# EAGLE board CT_schematic (EAGLE 7.6.0)

Size 100 x 80 mm. Coordinates in mm from the lower left corner, seen from the top.
Outline: 0,0 100,0 100,80 0,80 0,0
Copper layers (1*16): Top 0.035mm / dielectric 1.5mm / Bottom 0.035mm
Design rules "default": minimum track width 10mil, minimum drill 24mil, track to track 8mil, track to pad 8mil, pad to pad 8mil, via to via 8mil, smd to smd 8mil, copper to edge 40mil, drill to drill 8mil, minimum pad ring 10mil, minimum via ring 8mil, stop-mask expansion 4mil, vias tented up to drill 0mil, thermal gap 10mil

## Footprints (pad centres in the part's own frame; a part is rotated, then mirrored left to right if it is on the bottom)
C0603 = smd 0.8 x 0.8: 1 -0.762,0; 2 0.762,0
C0402 = smd 0.5 x 0.5: 1 -0.508,0; 2 0.508,0
C0805 = smd 1.2 x 1.3: 1 -1.016,0; 2 1.016,0
C1206 = smd 1.3 x 1.6: 1 -1.524,0; 2 1.524,0
DR1040 = smd 1.6 x 3.2: 1 -4.458,0; 2 4.458,0
R0603 = smd 0.8 x 0.8: 1 -0.762,0; 2 0.762,0
LQFP64 = smd 0.3 x 1.2: 1 -3.75,-5.75; 2 -3.25,-5.75; 3 -2.75,-5.75; 4 -2.25,-5.75; 5 -1.75,-5.75; 6 -1.25,-5.75; 7 -0.75,-5.75; 8 -0.25,-5.75; 9 0.25,-5.75; 10 0.75,-5.75; 11 1.25,-5.75; 12 1.75,-5.75; 13 2.25,-5.75; 14 2.75,-5.75; 15 3.25,-5.75; 16 3.75,-5.75; 33 3.75,5.75; 34 3.25,5.75; 35 2.75,5.75; 36 2.25,5.75; 37 1.75,5.75; 38 1.25,5.75; 39 0.75,5.75; 40 0.25,5.75; 41 -0.25,5.75; 42 -0.75,5.75; 43 -1.25,5.75; 44 -1.75,5.75; 45 -2.25,5.75; 46 -2.75,5.75; 47 -3.25,5.75; 48 -3.75,5.75 | smd 1.2 x 0.3: 17 5.75,-3.75; 18 5.75,-3.25; 19 5.75,-2.75; 20 5.75,-2.25; 21 5.75,-1.75; 22 5.75,-1.25; 23 5.75,-0.75; 24 5.75,-0.25; 25 5.75,0.25; 26 5.75,0.75; 27 5.75,1.25; 28 5.75,1.75; 29 5.75,2.25; 30 5.75,2.75; 31 5.75,3.25; 32 5.75,3.75; 49 -5.75,3.75; 50 -5.75,3.25; 51 -5.75,2.75; 52 -5.75,2.25; 53 -5.75,1.75; 54 -5.75,1.25; 55 -5.75,0.75; 56 -5.75,0.25; 57 -5.75,-0.25; 58 -5.75,-0.75; 59 -5.75,-1.25; 60 -5.75,-1.75; 61 -5.75,-2.25; 62 -5.75,-2.75; 63 -5.75,-3.25; 64 -5.75,-3.75
A2500R24A00GM = smd 1.5 x 0.61: 1 -3,7; 2 -3,6; 3 -3,5; 4 -3,4; 5 -3,3; 6 -3,2; 7 -3,1; 8 -3,0; 17 5.22,0; 18 5.22,1; 19 5.22,2; 20 5.22,3; 21 5.22,4; 22 5.22,5; 23 5.22,6; 24 5.22,7 | smd 0.61 x 1.5: 9 -2.39,-1.6; 10 -1.39,-1.6; 11 -0.39,-1.6; 12 0.61,-1.6; 13 1.61,-1.6; 14 2.61,-1.6; 15 3.61,-1.6; 16 4.61,-1.6 | smd 1 x 1: 25 -2.8,9; 26 -2.8,13; 27 5.02,9; 28 5.02,13; 29 0.11,5.75; 30 2.11,5.75
TST-110-05-T-D-RA = drill 1 pad 1.7 square: 1 0,0 | drill 1 pad 1.7: 2 0,2.54; 3 2.54,0; 4 2.54,2.54; 5 5.08,0; 6 5.08,2.54; 7 7.62,0; 8 7.62,2.54; 9 10.16,0; 10 10.16,2.54; 11 12.7,0; 12 12.7,2.54; 13 15.24,0; 14 15.24,2.54; 15 17.78,0; 16 17.78,2.54; 17 20.32,0; 18 20.32,2.54; 19 22.86,0; 20 22.86,2.54
FCI_10118193-0001LF = smd 0.4 x 1.35: 1 -1.3,2.675; 2 -0.65,2.675; 3 0,2.675; 4 0.65,2.675; 5 1.3,2.675 | smd 1.6 x 1.4: 6 -3.2,2.45; 7 3.2,2.45 | smd 1.9 x 1.9: 8 -1.2,0; 9 1.2,0 | hole 0.5: -3.3,0; 3.3,0
SOT143B = smd 1 x 0.7: 1 -0.75,-1 | smd 0.6 x 0.7: 2 0.95,-1; 3 0.95,1; 4 -0.95,1
ABLS-25.000MHZ-B2F-T = smd 5.6 x 2.8: 1 -3.81,0; 2 5.69,0
ASEK = smd 1.4 x 1: 1 -1.1,-0.8; 2 1.1,-0.8; 3 1.1,0.8; 4 -1.1,0.8
TSOT-23-5 = smd 1.3 x 0.62: 1 -1.31,0.95; 2 -1.31,0; 3 -1.31,-0.95; 4 1.31,-0.95; 5 1.31,0.95
DFN8_2X3MC = smd 0.813 x 0.305: 1 -1.398,0.75; 2 -1.398,0.25; 3 -1.398,-0.25; 4 -1.398,-0.75; 5 1.398,-0.75; 6 1.398,-0.25; 7 1.398,0.25; 8 1.398,0.75 | smd 1.753 x 1.549: 9 0,0
JST-2-SMD = smd 1 x 4.6: 1 -1,-3.7; 2 1,-3.7 | smd 1.6 x 3.4: NC1 -3.4,1.5; NC2 3.4,1.5
SON-6 = smd 0.55 x 0.3: 1 -0.355,0.5 | smd 0.52 x 0.3: 2 -0.37,0; 3 -0.37,-0.5; 4 0.37,-0.5; 5 0.37,0; 6 0.37,0.5
SW_4-1437565-2 = smd 1.4 x 2.1: 1 -2.23,4.55; 2 -2.23,-4.55; 3 2.23,4.55; 4 2.23,-4.55
LGM67K-G1J2-24-Z = smd 0.8 x 1.4: A -2,0; C 0,0
NC7SZ125M5X = smd 1.3 x 0.7: 1 -1.3,0.95; 2 -1.3,0; 3 -1.3,-0.95; 4 1.3,-0.95; 5 1.3,0.95
DUMMY_PACKAGE_112 = drill 0.3: 1 0,-1; 2 1.5,-1; 3 3,-1

## Placement (x,y rotation side)
C1  1e-07  [C0603]  -58.42,63.5 0 top  (outside the outline)
C2  1e-07  [C0603]  -62.23,63.5 0 top  (outside the outline)
C3  1e-07  [C0603]  -15.24,68.58 0 top  (outside the outline)
C4  1e-07  [C0603]  -19.05,68.58 0 top  (outside the outline)
C5  4.7e-06  [C0603]  -54.61,63.5 0 top  (outside the outline)
C6  1e-07  [C0603]  -22.86,68.58 0 top  (outside the outline)
C7  1e-08  [C0603]  -26.67,68.58 0 top  (outside the outline)
C8  1e-06  [C0603]  -30.48,68.58 0 top  (outside the outline)
C9  1e-11  [C0402]  -49.53,68.58 0 top  (outside the outline)
C10  1e-11  [C0402]  -53.34,68.58 0 top  (outside the outline)
C11  1e-05  [C0805]  -40.64,57.15 0 top  (outside the outline)
C12  1e-07  [C0402]  -57.15,68.58 0 top  (outside the outline)
C13  1e-08  [C0402]  -60.96,68.58 0 top  (outside the outline)
C14  1e-05  [C0805]  -45.72,57.15 0 top  (outside the outline)
C15  1e-05  [C0805]  -50.8,57.15 0 top  (outside the outline)
C16  1e-07  [C0402]  -64.77,68.58 0 top  (outside the outline)
C17  1e-05  [C1206]  -16.51,57.15 0 top  (outside the outline)
C18  1e-05  [C1206]  -22.86,57.15 0 top  (outside the outline)
C19  1e-08  [C0402]  -15.24,73.66 0 top  (outside the outline)
C20  1e-08  [C0402]  -19.05,73.66 0 top  (outside the outline)
I1  3.8e-06  [DR1040]  -38.1,31.75 0 top  (outside the outline)
R2  1000.0  [R0603]  -34.29,68.58 0 top  (outside the outline)
R4  4700.0  [R0603]  -38.1,68.58 0 top  (outside the outline)
R5  10000.0  [R0603]  -30.48,63.5 0 top  (outside the outline)
R6  10000.0  [R0603]  -35.56,63.5 0 top  (outside the outline)
R7  220000.0  [R0603]  -15.24,63.5 0 top  (outside the outline)
R8  1000000.0  [R0603]  -63.5,57.15 0 top  (outside the outline)
R9  10000.0  [R0603]  -40.64,63.5 0 top  (outside the outline)
R10  10000.0  [R0603]  -45.72,63.5 0 top  (outside the outline)
R11  9100.0  [R0603]  -41.91,68.58 0 top  (outside the outline)
R12  680000.0  [R0603]  -20.32,63.5 0 top  (outside the outline)
R13  120000.0  [R0603]  -25.4,63.5 0 top  (outside the outline)
R14  2000.0  [R0603]  -45.72,68.58 0 top  (outside the outline)
R15  10000.0  [R0603]  -50.8,63.5 0 top  (outside the outline)
U1  STM32L162RCT6  [LQFP64]  -44.45,7.62 0 top  (outside the outline)
U2  A2500R24A00GM  [A2500R24A00GM]  -27.94,7.62 0 top  (outside the outline)
U3  TST-110-05-T-D-RA  [TST-110-05-T-D-RA]  -58.42,39.37 0 top  (outside the outline)
U4  10118193-0001LF  [FCI_10118193-0001LF]  -19.05,41.91 0 top  (outside the outline)
U5  prtr5v0u2ax  [SOT143B]  -31.75,73.66 0 top  (outside the outline)
U6  ABLS-25.000MHZ-B2F-T  [ABLS-25.000MHZ-B2F-T]  -45.72,50.8 0 top  (outside the outline)
U7  ASEK-32.768KHz-ECST  [ASEK]  -29.21,50.8 0 top  (outside the outline)
U8  ltc3406es5  [TSOT-23-5]  -55.88,57.15 0 top  (outside the outline)
U9  MCP73831T-2ACI/MC  [DFN8_2X3MC]  -46.99,72.39 0 top  (outside the outline)
U10  S2B-PH-SM4-TB(LF)(SN)  [JST-2-SMD]  -53.34,31.75 0 top  (outside the outline)
U11  TPS3895ADRYR  [SON-6]  -40.64,72.39 0 top  (outside the outline)
U12  4-1437565-2  [SW_4-1437565-2]  -27.94,31.75 0 top  (outside the outline)
U13  Q65110A2395  [LGM67K-G1J2-24-Z]  -57.15,50.8 0 top  (outside the outline)
U14  nc7sz125m5x  [NC7SZ125M5X]  -27.94,57.15 0 top  (outside the outline)
U15  nc7sz125m5x  [NC7SZ125M5X]  -34.29,57.15 0 top  (outside the outline)
U16  Dummy  [DUMMY_PACKAGE_112]  -38.1,73.66 0 top  (outside the outline)

## Library data of the parts
C1-C20 I1 R2 R4-R15 U1-U16 = circuit_tree

## Nets
CLK_CRYSTAL_U1_5: C9.1 U1.5 U6.1
CLK_CRYSTAL_U1_6: C10.1 U1.6 U6.2
CLK_U1_3: U1.3 U7.3
GND: C1.2 C2.2 C3.2 C4.2 C5.2 C6.2 C7.2 C8.2 C9.2 C10.2 C11.2 C12.2 C13.2 C14.2 C15.1 C15.2 C16.2 C17.2 C18.2 C19.2 C20.2 R2.2 R5.2 R7.2 R11.2 R13.2 R14.2 U1.12 U1.18 U1.31 U1.47 U1.63 U2.8 U2.17 U3.4 U3.6 U3.8 U3.10 U3.12 U3.14 U3.16 U3.18 U3.20 U4.5 U4.6 U4.7 U4.8 U4.9 U5.1 U7.2 U8.2 U9.6 U9.9 U10.2 U11.2 U13.C U14.2 U14.3 U15.1 U15.3 U16.1
INPUT_USBPOWER_5V: C17.1 R15.2 U4.1 U5.4 U9.1 U9.2
NET_U1_1: C6.1 U1.1
NET_U1_7: R4.1 U1.7 U15.4
NET_U1_60: R5.1 U1.60
NET_U1_61: U13.A
NET_U1_62: U12.3 U12.4
NET_U8_1: U8.1
NET_U8_3: I1.1 U8.3
NET_U8_5: R7.1 R8.1 U8.5
NET_U8_ATNET_3: I1.2 R8.2
NET_U9_5: R15.1 U9.5
NET_U9_8: R14.1 U9.8
NET_U11_1: R10.1 R11.1 U11.1
NET_U11_3: R12.2 R13.1 U11.3
NET_U11_4: R9.1 U11.4 U14.4 U15.2
NET_U12_1: R2.1 U12.1 U12.2
PROC_PC13_WKUP2: U1.2 U16.2
PROC_PC15_OSC32_OUT: U1.4 U16.3
PROC_SPI1_MISO: U1.22 U2.10
PROC_SPI1_MOSI: U1.23 U2.11
PROC_SPI1_NSS: U1.20 U2.12
PROC_SPI1_SCK: U1.21 U2.9
PROC_SYS_JTCK_SWCLK: U1.49 U3.9
PROC_SYS_JTDO_TRACESWO: U1.55 U3.13
PROC_SYS_JTMS_SWDIO: U1.46 U3.7
PROC_USB_DM: U1.44 U4.2 U5.3
PROC_USB_DP: U1.45 U4.3 U5.2
RST_OUT_U3_SRESET_B: R6.1 U3.15 U14.1
VCC_S1_3V7: C14.1 C18.1 U8.4 U9.3 U9.4 U10.1
VCC_TIER1_3V3: C1.1 C2.1 C3.1 C4.1 C5.1 C7.1 C8.1 C11.1 C12.1 C13.1 C15.2 C16.1 C19.1 C20.1 I1.2 R4.2 R6.2 R8.2 R9.2 R10.2 R12.1 U1.13 U1.19 U1.32 U1.48 U1.64 U2.18 U3.1 U7.4 U11.6 U14.5 U15.5

## Tracks (layer width: path | path; a pad name or v marks a point on that pad's centre or on a via)
CLK_CRYSTAL_U1_5  (2 unrouted)
CLK_CRYSTAL_U1_6  (2 unrouted)
CLK_U1_3  (1 unrouted)
GND  (60 unrouted)
INPUT_USBPOWER_5V  (5 unrouted)
NET_U1_1  (1 unrouted)
NET_U1_7  (2 unrouted)
NET_U1_60  (1 unrouted)
NET_U1_62  (1 unrouted)
NET_U8_3  (1 unrouted)
NET_U8_5  (2 unrouted)
NET_U8_ATNET_3  (1 unrouted)
NET_U9_5  (1 unrouted)
NET_U9_8  (1 unrouted)
NET_U11_1  (2 unrouted)
NET_U11_3  (2 unrouted)
NET_U11_4  (3 unrouted)
NET_U12_1  (2 unrouted)
PROC_PC13_WKUP2  (1 unrouted)
PROC_PC15_OSC32_OUT  (1 unrouted)
PROC_SPI1_MISO  (1 unrouted)
PROC_SPI1_MOSI  (1 unrouted)
PROC_SPI1_NSS  (1 unrouted)
PROC_SPI1_SCK  (1 unrouted)
PROC_SYS_JTCK_SWCLK  (1 unrouted)
PROC_SYS_JTDO_TRACESWO  (1 unrouted)
PROC_SYS_JTMS_SWDIO  (1 unrouted)
PROC_USB_DM  (2 unrouted)
PROC_USB_DP  (2 unrouted)
RST_OUT_U3_SRESET_B  (2 unrouted)
VCC_S1_3V7  (5 unrouted)
VCC_TIER1_3V3  (31 unrouted)